# Altium PCB CM Adapter.PcbDoc
Units mil, origin at the board's own origin, x right, y up, seen from the top; angles counter-clockwise.
Board outline 1320 x 1220 mil, 2 copper layers (Top Layer, Bottom Layer); 2 components, 8 nets, 31 pads, 0 vias.
Unrouted connection lines stored in the file: 1.
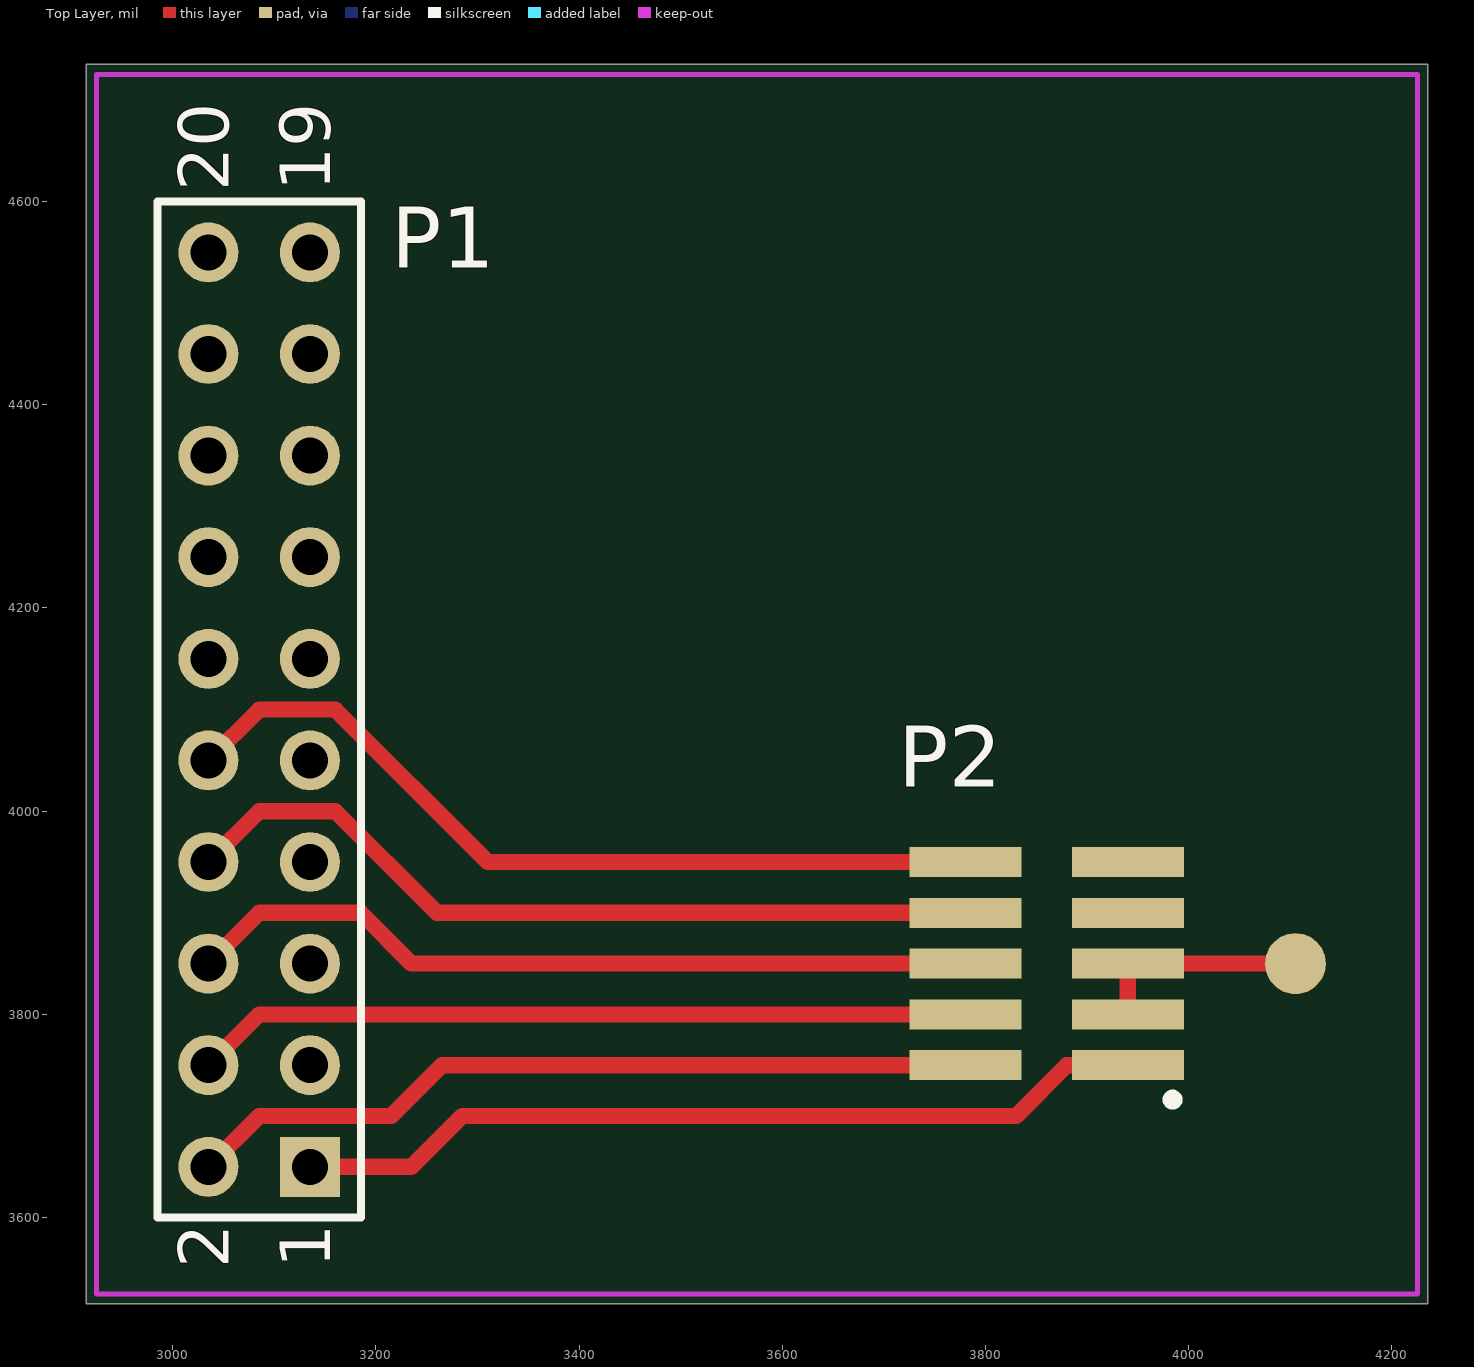
[diagram p0: Top Layer view]
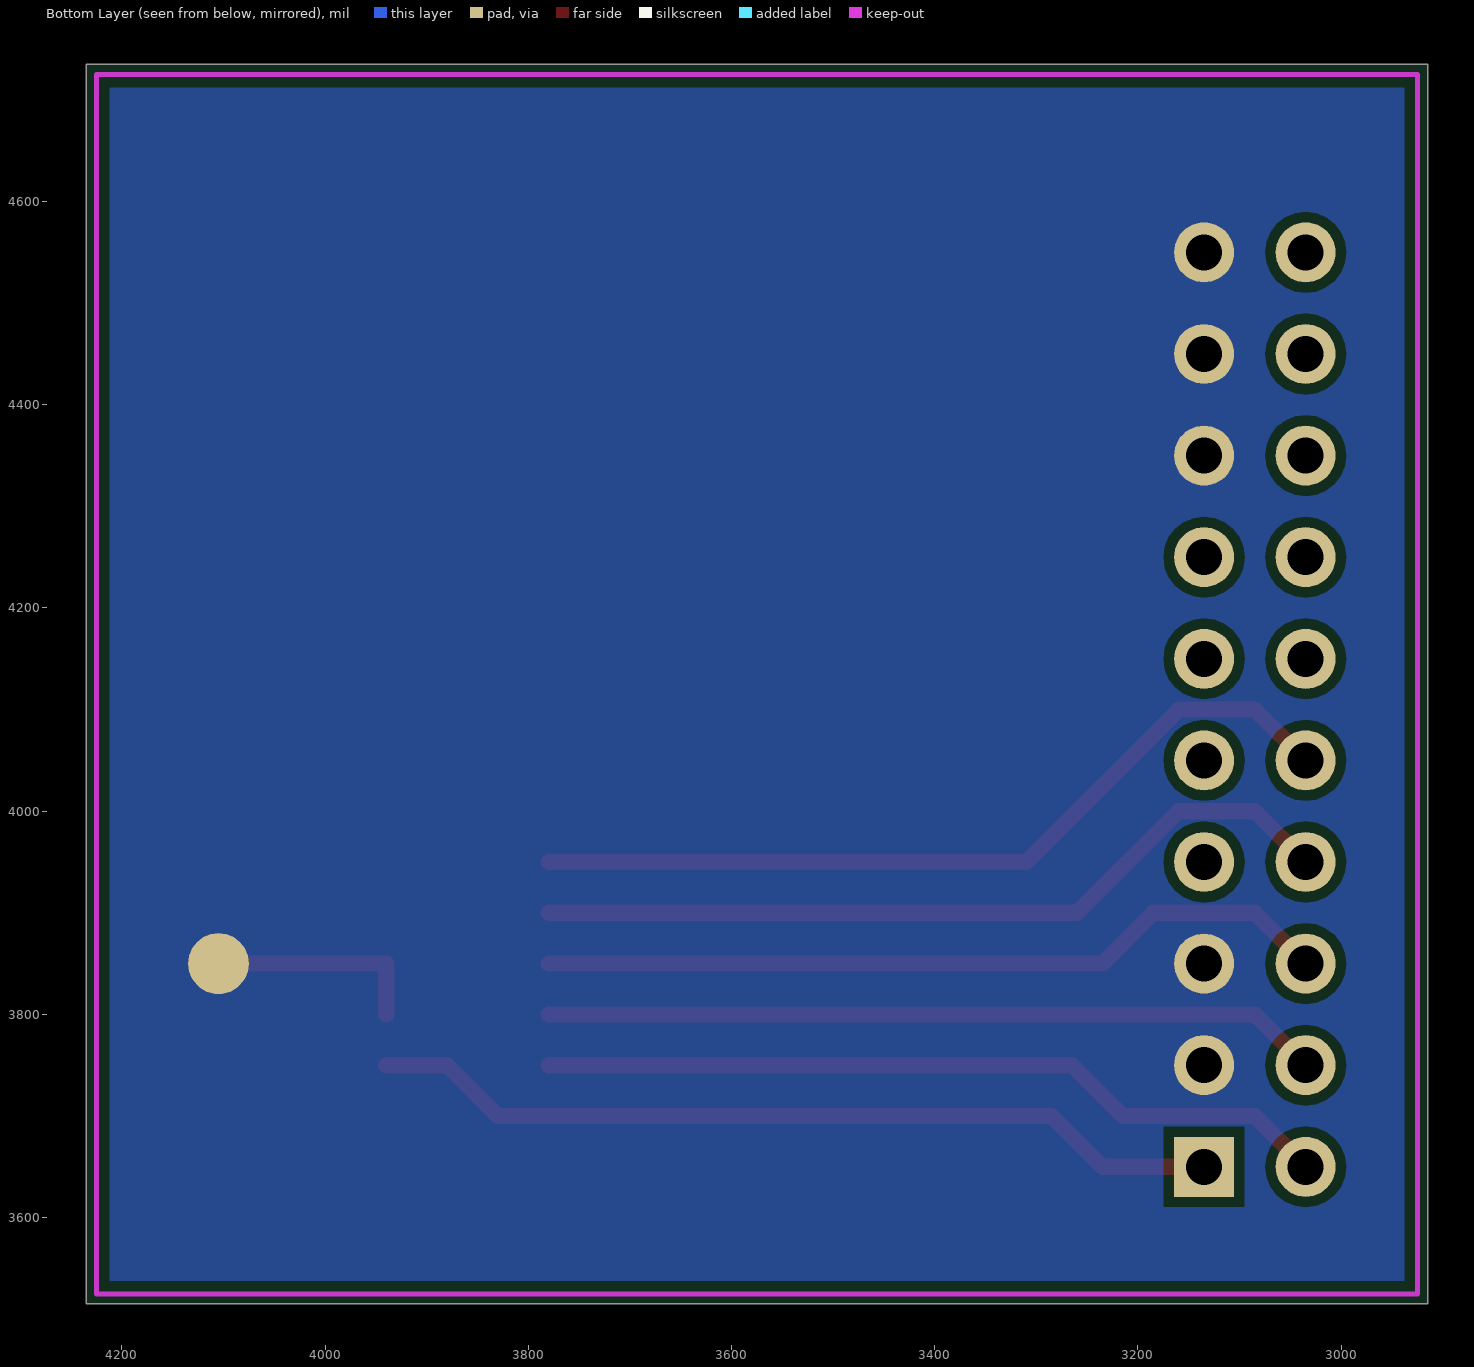
[diagram p1: Bottom Layer view, seen from below]

## Layer stack, top to bottom
Top Layer: signal copper 1.4
Dielectric: dielectric 12.6, FR-4, Dk 4.8
Bottom Layer: signal copper 1.4

## Board outline
2915,3515 2915,4735 4235,4735 4235,3515

## Design rules (kind name [scope] priority, off if disabled: settings)
Clearance [All] p1: gap=10
PolygonConnect [All] p1: connectstyle=Direct reliefconductorwidth=10 reliefentries=4 polygonreliefangle="90 Angle" airgapwidth=10
RoutingVias [All] p1: holewidth=28 width=50 viastyle="Through Hole" minholewidth=28 minwidth=50 maxholewidth=28 maxwidth=50
SolderMaskExpansion [All] p1: expansion=4
Width [All] p1: maxlimit=16 minlimit=10 preferedwidth=16
28 further rules are at their usual default settings.

## Components (designator, comment, footprint, x,y, rotation, side; value= is the part's Value field where it differs from the comment)
P1 "Header 10X2" HDR2X10 3135,3650 r90 top
P2 "ARM Cortex JTAG-DEBUG" FTSH-105-XX-X-DV 3860,3850 r270 top

## Footprints (in the part's own frame and the unit in brackets; to place one, negate y for a bottom-side part, rotate by r counter-clockwise, add the part's x,y. Pads: shape width x height; smd on the part's side, far side on the other; paste and mask are expansions set on the pad)
FTSH-105-XX-X-DV [mm] "1.27mm pitch, 10 pin, terminal strip; vertical, SMT"
  rect 0.75x2.8 smd mask+0: 1(2.54,2.03) 2(2.54,-2.03) 3(1.27,2.03) 4(1.27,-2.03) 5(0,2.03) 6(0,-2.03) 7(-1.27,2.03) 8(-1.27,-2.03) 9(-2.54,2.03) 10(-2.54,-2.03)
  silkscreen extent 3.28,3.03 3.52,3.27
HDR2X10 [mm] "Connector; Header; 10x2 Position"
  rect 1.5x1.5 hole 0.9: 1(0,0)
  round 1.5 hole 0.9: 2(0,2.54) 3(2.54,0) 4(2.54,2.54) 5(5.08,0) 6(5.08,2.54) 7(7.62,0) 8(7.62,2.54) 9(10.16,0) 10(10.16,2.54) 11(12.7,0) 12(12.7,2.54) 13(15.24,0) 14(15.24,2.54) 15(17.78,0) 16(17.78,2.54) 17(20.32,0) 18(20.32,2.54) 19(22.86,0) 20(22.86,2.54)
  silkscreen extent -1.27,-1.27 24.13,3.81

## Part data
P1: "Header, 10-Pin, Dual row"
P2: library part "ARM Cortex JTAG-DEBUG Header"

## Free pads (board coordinates)
  round 60 all layers, no hole: 0(4105,3850)

## Nets (pads, with @x,y where several pads share a name; then routed paths per layer and width w, separated by ;. In a path a pad name is that pad's centre, name@x,y a point inside that pad or via, vN(x,y) a via of type N, cw(c..) or ccw(c..) an arc to the next point about the centre after c; other vN are vias at no path point)
5VCC: P1.11 P1.13
GND: P1.3 P1.5 P1.15 P1.17 P1.19 P2.3 P2.5 pad.0 | length 215.1
  Top Layer w16: P2.3 P2.5 pad.0
NRESET: P1.10 P2.10 | length 827.9
  Top Layer w16: P1.10 3085,4100 3160,4100 3310,3950 P2.10
SWCLK/TCK: P1.4 P2.4 | length 765.8
  Top Layer w16: P1.4 3085,3800 P2.4
SWDIO/TMS: P1.2 P2.2 | length 786.5
  Top Layer w16: P1.2 3085,3700 3215,3700 3265,3750 P2.2
SWO/TDO: P1.6 P2.6 | length 786.5
  Top Layer w16: P1.6 3085,3900 3185,3900 3235,3850 P2.6
TDI: P1.8 P2.8 | length 807.2
  Top Layer w16: P1.8 3085,4000 3160,4000 3260,3900 P2.8
VTREF: P1.1 P2.1 | length 846.3
  Top Layer w16: P1.1 3235,3650 3285,3700 3830,3700 3880,3750 P2.1
pads on no net: P1.7 P1.9 P1.12 P1.14 P1.16 P1.18 P1.20 P2.7 P2.9

## Polygon pours and split planes (outlines as drawn)
GND on Bottom Layer "Top Layer-No Net" (solid, remove dead copper, pour order 2): 2925,4725 2925,3525 4225,3525 4225,4725

## Keep-outs
Keep-Out Layer:
  lines w5: 2925,3525 4225,3525 4225,4725 2925,4725 2925,3525

## Silkscreen, mask and mechanical layers (free items; w line width, h text height)
Mechanical 15:
  the board outline again, w5

## Text inside footprints (layer, text, board x,y; h text height)
P1: Top Overlay "20" at 3055,4610 h50 r90; Top Overlay "19" at 3155,4610 h50 r90; Top Overlay "1" at 3155,3550 h50 r90; Top Overlay "2" at 3055,3550 h50 r90